# Altium PCB PCB1.PcbDoc
Units mil, origin at the board's own origin, x right, y up, seen from the top; angles counter-clockwise.
Board outline 2290 x 3500 mil, 2 copper layers (Top Layer, Bottom Layer); 65 components, 55 nets, 269 pads, 79 vias.
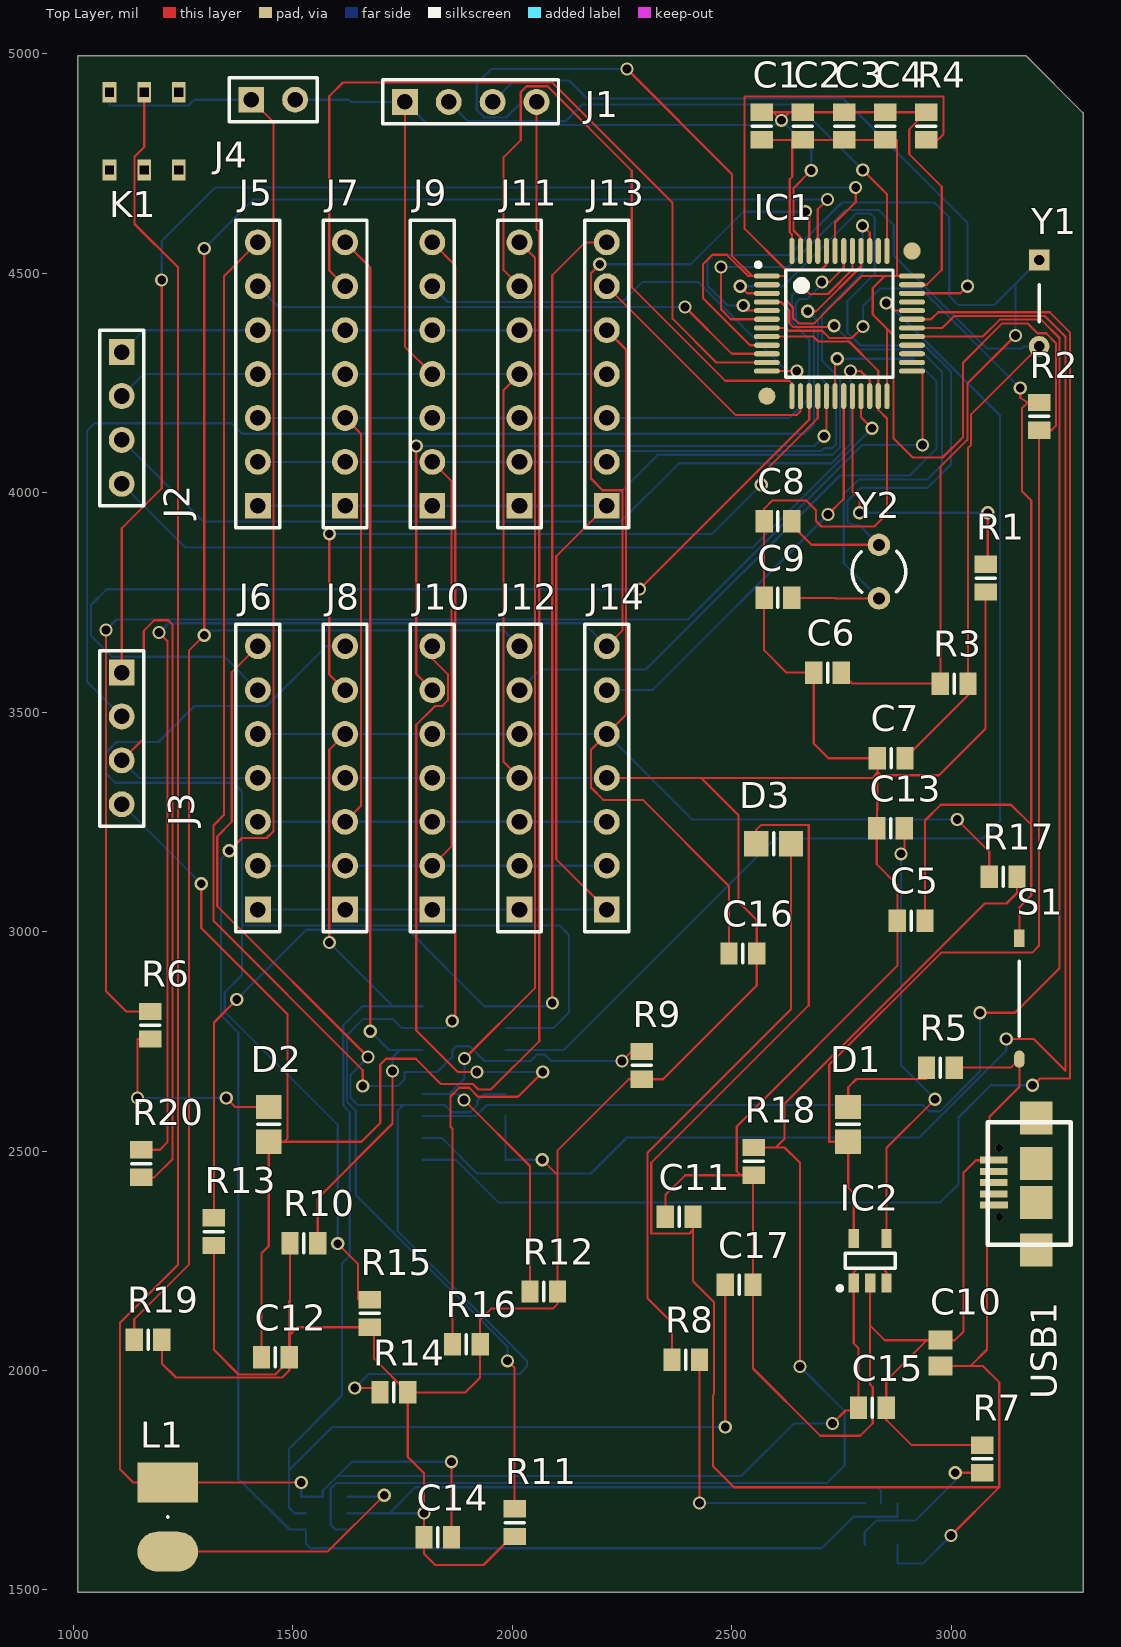
[diagram p0: Top Layer view]
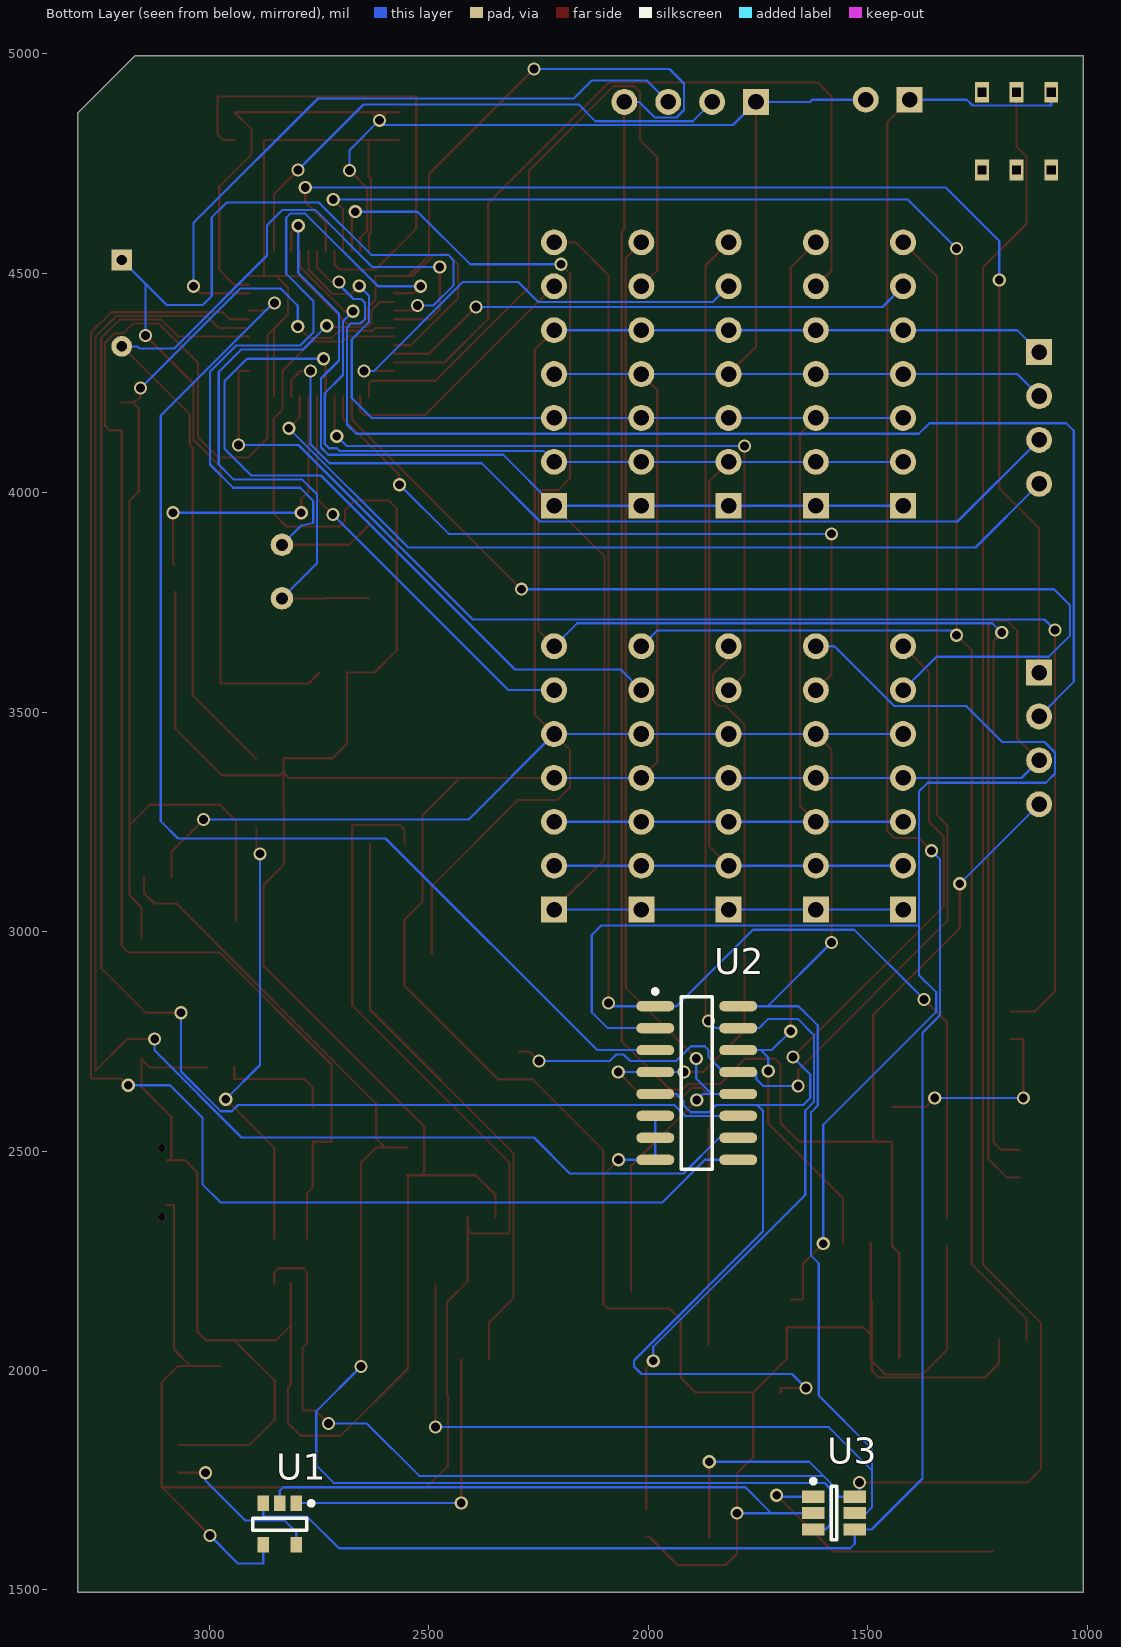
[diagram p1: Bottom Layer view, seen from below]

## Layer stack, top to bottom
Top Solder: solder mask 0.4, Solder Resist, Dk 3.5
Top Layer: signal copper 1.4
Dielectric 1: dielectric 12.6, FR-4, Dk 4.8
Bottom Layer: signal copper 1.4
Bottom Solder: solder mask 0.4, Solder Resist, Dk 3.5

## Board outline
1010,1495 1010,4995 3170,4995 3300,4865 3300,1495

## Design rules (kind name [scope] priority, off if disabled: settings)
Clearance [All] p1: gap=3.5 ignorepadtopadclearanceinfootprint=TRUE except(0: Arc-Hole Track-Hole SMDPad-Hole THPad-Hole Via-Hole Fill-Hole Poly-Hole Region-Hole Text-Hole; 10: Arc-SMDPad Arc-Via Track-SMDPad Track-Via SMDPad-Via Via-Via)
PolygonConnect [All] p1: connectstyle=Relief reliefconductorwidth=10 reliefentries=4 polygonreliefangle="90 Angle" airgapwidth=10
RoutingVias [All] p1: holewidth=20 width=30 viastyle="Through Hole" minholewidth=15 minwidth=30 maxholewidth=20 maxwidth=50
SolderMaskExpansion [All] p1: expansion=4
Width Width_2 [All] p1: maxlimit=5 minlimit=5 preferedwidth=5 minimp=50.000000 maximp=50.000000 favimp=50.000000
30 further rules are at their usual default settings.

## Components (designator, comment, footprint, x,y, rotation, side; value= is the part's Value field where it differs from the comment)
C1 "Cap Semi" 6-0805_L 2568,4835 r270 top value=104
C2 "Cap Semi" 6-0805_L 2661.75,4835 r270 top value=1uf
C3 "Cap Semi" 6-0805_L 2755.5,4835 r270 top value=104
C4 "Cap Semi" 6-0805_L 2849.25,4835 r270 top value=104
C5 "Cap Semi" 6-0805_L 2908.5,3025 r0 top value=104
C6 "Cap Semi" 6-0805_L 2718,3590 r0 top value=22pF
C7 "Cap Semi" 6-0805_L 2863,3395 r0 top value=22pF
C8 "Cap Semi" 6-0805_L 2605,3935 r0 top value=22pF
C9 "Cap Semi" 6-0805_L 2605,3760 r0 top value=22pF
C10 "Cap Pol3" C0805 2975,2039.53 r90 top value=1uF
C11 "Cap Semi" 6-0805_L 2380,2350 r0 top value=104
C12 "Cap Semi" 6-0805_L 1460,2030 r180 top value=2.2uF
C13 "Cap Semi" 6-0805_L 2861.5,3235 r0 top value=470pF
C14 "Cap Semi" 6-0805_L 1830,1620 r0 top value=10uF
C15 "Cap Semi" 6-0805_L 2820,1915 r180 top value=0.1uF
C16 "Cap Semi" 6-0805_L 2525,2950 r180 top value=0.1uf
C17 "Cap Semi" 6-0805_L 2516.5,2195 r180 top value=22uf
D1 "LED" 6-0805_M 2765,2560.63 r90 top
D2 "LED" 6-0805_M 1445,2560.63 r90 top
D3 "LED" 6-0805_M 2595,3200 r0 top
IC1 "STM32F103C8T6" LQFP48 2745,4385 r0 top
IC2 "MIC5205-3.3" SOT-23-5 2815,2250 r90 top
J1 "CON4" HDR1X4 1755,4890 r0 top
J2 "蓝牙" HDR1X4 1110,4320 r270 top
J3 "MPU6050" HDR1X4 1110,3590 r270 top
J4 "BAT" HDR1X2 1405,4895 r0 top
J5 "CON7" HDR1X7 1420,3970 r90 top
J6 "CON7" HDR1X7 1420,3050 r90 top
J7 "CON7" HDR1X7 1618.75,3970 r90 top
J8 "CON7" HDR1X7 1618.75,3050 r90 top
J9 "CON7" HDR1X7 1817.5,3970 r90 top
J10 "CON7" HDR1X7 1817.5,3050 r90 top
J11 "CON7" HDR1X7 2016.25,3970 r90 top
J12 "CON7" HDR1X7 2016.25,3050 r90 top
J13 "CON7" HDR1X7 2215,3970 r90 top
J14 "CON7" HDR1X7 2215,3050 r90 top
K1 "BUTTON" switch 1240,4912.17 r270 top
L1 "10UH" 0850 1215,1745 r270 top
R1 "Res3" 6-0805_L 3078,3805 r270 top value=10K
R2 "Res3" 6-0805_L 3200,4173.5 r270 top value=10K
R3 "Res3" 6-0805_L 3006.5,3565 r0 top value=10M
R4 "Res3" 6-0805_L 2943,4835 r270 top value=10K
R5 "Res3" 6-0805_L 2975,2690 r180 top value=1K
R6 "Res3" 6-0805_L 1175,2786.5 r270 top value=1K
R7 "Res3" 6-0805_L 3070,1798.5 r90 top value=330
R8 "Res3" 6-0805_L 2395,2025 r180 top value=330
R9 "Res3" 6-0805_L 2295,2695 r90 top value=10K
R10 "Res3" 6-0805_L 1525,2290 r0 top value=10K
R11 "Res3" 6-0805_L 2005,1653.5 r90 top value=10K
R12 "Res3" 6-0805_L 2071.5,2180 r180 top value=10K
R13 "Res3" 6-0805_L 1320,2316.5 r90 top value=10K
R14 "Res3" 6-0805_L 1730,1950 r180 top value=10K
R15 "Res3" 6-0805_L 1675,2130 r90 top value=10K
R16 "Res3" 6-0805_L 1895,2060 r180 top value=10K
R17 "Res3" 6-0805_L 3118,3125 r0 top value=525K
R18 "Res3" 6-0805_L 2550,2476.5 r270 top value=100k
R19 "Res3" 6-0805_L 1170,2070 r180 top value=10K
R20 "Res3" 6-0805_L 1155,2471.5 r90 top value=10K
S1 "KEY_2P" SOP2 3155,2985 r270 top
U1 "PW4054" SOT-23-CT5_L 2840,1650 r270 bottom
U2 "CD4051BCM" M16A_N 1890,2655 r180 bottom
U3 "PS7516" SOT23-6_M 1577.24,1675 r180 bottom
USB1 "MICRO USB" "MICRO USB" 3145,2425 r90 top
Y1 "XTAL_8M" xtal 3200,4530 r270 top
Y2 "XTAL_32.768K" R38 2835,3820 r0 top

## Footprints (in the part's own frame and the unit in brackets; to place one, negate y for a bottom-side part, rotate by r counter-clockwise, add the part's x,y. Pads: shape width x height; smd on the part's side, far side on the other; paste and mask are expansions set on the pad)
6-0805_L [mm] "Chip Resistor, Body 2.0x1.2mm, IPC High Density"
  rect 1x1.3 smd: 1(-0.8,0) 2(0.8,0)
  silkscreen extent 0,-0.55 0,0.55, body extent -1.07,-0.7 1.07,0.7, height 0.7
6-0805_M [mm] "Chip Resistor, Body 2.0x1.2mm, IPC Low Density"
  rect 1.4x1.5 smd: 1(-1,0) 2(1,0)
  silkscreen extent 0,-0.65 0,0.65, body extent -1.07,-0.7 1.07,0.7, height 0.7
0850 [mm]
  rect 2.3x3.5 smd: 1(0,0)
  oval 2.3x3.5 smd: 2(4,0)
  silkscreen extent 1.99,0 2.01,0
C0805 [mm] "Chip Capacitor, Body 2.0x1.3mm, IPC High Density"
  rect 1.1x1.4 smd: 1(-0.75,0) 2(0.75,0)
  body extent -1.1,-0.72 1.1,0.72, height 1.4
HDR1X2 [mm] "Connector; Header; 2 Position"
  rect 1.5x1.5 hole 0.9: 1(0,0)
  round 1.5 hole 0.9: 2(2.54,0)
  silkscreen extent -1.27,-1.27 3.81,1.27
HDR1X4 [mm] "Connector; Header; 4 Position"
  rect 1.5x1.5 hole 0.9: 1(0,0)
  round 1.5 hole 0.9: 2(2.54,0) 3(5.08,0) 4(7.62,0)
  silkscreen extent -1.27,-1.27 8.89,1.27, body extent -1.27,-1.27 8.89,1.27, height 8.38
HDR1X7 [mm] "Connector; Header; 7 Position"
  rect 1.5x1.5 hole 0.9: 1(0,0)
  round 1.5 hole 0.9: 2(2.54,0) 3(5.08,0) 4(7.62,0) 5(10.16,0) 6(12.7,0) 7(15.24,0)
  silkscreen extent -1.27,-1.27 16.51,1.27
LQFP48 [mm]
  oval 1.5x0.3 smd: 1(-4.2,2.75) 2(-4.2,2.25) 3(-4.2,1.75) 4(-4.2,1.25) 5(-4.2,0.75) 6(-4.2,0.25) 7(-4.2,-0.25) 8(-4.2,-0.75) 9(-4.2,-1.25) 10(-4.2,-1.75) 11(-4.2,-2.25) 12(-4.2,-2.75) 25(4.2,-2.75) 26(4.2,-2.25) 27(4.2,-1.75) 28(4.2,-1.25) 29(4.2,-0.75) 30(4.2,-0.25) 31(4.2,0.25) 32(4.2,0.75) 33(4.2,1.25) 34(4.2,1.75) 35(4.2,2.25) 36(4.2,2.75)
  oval 0.3x1.5 smd: 13(-2.75,-4.2) 14(-2.25,-4.2) 15(-1.75,-4.2) 16(-1.25,-4.2) 17(-0.75,-4.2) 18(-0.25,-4.2) 19(0.25,-4.2) 20(0.75,-4.2) 21(1.25,-4.2) 22(1.75,-4.2) 23(2.25,-4.2) 24(2.75,-4.2) 37(2.75,4.2) 38(2.25,4.2) 39(1.75,4.2) 40(1.25,4.2) 41(0.75,4.2) 42(0.25,4.2) 43(-0.25,4.2) 44(-0.75,4.2) 45(-1.25,4.2) 46(-1.75,4.2) 47(-2.25,4.2) 48(-2.75,4.2)
  round 1 smd: 49(-4.2,-4.2) 50(4.2,4.2)
  silkscreen extent -4.82,-3.1 3.1,3.52, body extent -4.49,-4.5 4.5,4.5, height 1.6
M16A_N [mm] "SOIC, 16-Leads, Body 9.9x3.9mm, Pitch 1.27mm, IPC Medium Density"
  oval 2.2x0.6 smd: 1(-2.4,4.445) 2(-2.4,3.175) 3(-2.4,1.905) 4(-2.4,0.635) 5(-2.4,-0.635) 6(-2.4,-1.905) 7(-2.4,-3.175) 8(-2.4,-4.445) 9(2.4,-4.445) 10(2.4,-3.175) 11(2.4,-1.905) 12(2.4,-0.635) 13(2.4,0.635) 14(2.4,1.905) 15(2.4,3.175) 16(2.4,4.445)
  silkscreen extent -2.53,-5 0.9,5.42, body extent -2,-5 2,5, height 1.75
"MICRO USB" [mm]
  rect 0.4x1.6 smd: 1(-1.216,1.214) 2(-0.575,1.225) 3(0.075,1.225) 4(0.725,1.225) 5(1.375,1.225)
  rect 1.9x1.9 smd: ""(-3.825,-1.225) ""(-1.075,-1.225) ""(1.175,-1.225) ""(3.825,-1.225)
  silkscreen extent -3.53,-3.22 3.57,1.58, body extent -4.43,-3.77 4.38,1.82, height 2.54
R38 [mm] "Crystal, Thru-Hole; 2 Leads; Body 3.1 x 8.2 mm (Dia.xH)"
  round 1.3 hole 0.7: 1(0,1.55) 2(0,-1.55)
  silkscreen extent -1.55,-1.19 1.55,1.17
SOP2 [mm]
  rect 1x0.6 smd: 1(0,0)
  oval 1x0.6 smd: 2(7,0)
  silkscreen extent 1.34,0 5.67,0
SOT23-6_M [mm] "SOT23, 6-Leads, Body 2.9x1.6mm, Pitch 0.95mm, Lead Span 2.7mm, IPC Low Density"
  rect 1.3x0.7 smd: 1(-1.2,0.95) 2(-1.2,0) 3(-1.2,-0.95) 4(1.2,-0.95) 5(1.2,0) 6(1.2,0.95)
  silkscreen extent -1.33,-1.55 0.15,1.97, body extent -0.9,-1.55 0.9,1.55, height 1.45
SOT-23-5 [mm]
  rect 1.1x0.6 smd: 1(-1.3,0.95) 2(-1.3,0) 3(-1.3,-0.95) 4(1.3,-0.95) 5(1.3,0.95)
  silkscreen extent -1.72,-1.45 0.42,1.87, body extent -1.37,-1.45 1.43,1.45, height 1.45
SOT-23-CT5_L [mm] "SOT23, 5-Leads, Body 2.9x1.6mm, Pitch 0.95mm, Lead Span 2.7mm, IPC High Density"
  rect 0.9x0.65 smd: 1(-1.2,0.95) 2(-1.2,0) 3(-1.2,-0.95) 4(1.2,-0.95) 5(1.2,0.95)
  silkscreen extent -1.32,-1.55 0.35,1.95, body extent -0.9,-1.55 0.9,1.55, height 1.45
switch [mm]
  rect 1.2x0.8 hole 0.5 square: 1(0,0) 2(0,-2) 3(0,-4) 4(4.5,0) 5(4.5,-2) 6(4.5,-4)
xtal [mm]
  rect 1.2x1.2 hole 0.6: 1(0,0)
  round 1.2 hole 0.6: 2(5,0)
  silkscreen extent 1.43,0 3.56,0

## Part data
C1 C2 C3 C4 C5 C6 C7 C8 C9 C11 C12 C13 C14 C15 C16 C17: "Capacitor (Semiconductor SIM Model)", LatestRevisionDate=29-May-2009, LatestRevisionNote="IPC-7351 Footprint Added.", PackageDescription="Chip Capacitor", PackageReference=C1206, Published=8-Jun-2000, Publisher="Altium Limited"
C10: "Polarized Capacitor (Surface Mount)", LatestRevisionDate=29-May-2009, LatestRevisionNote="IPC-7351 Footprint Added.", PackageDescription="Chip Capacitor", PackageReference=C0805, Published=8-Jun-2000, Publisher="Altium Limited"
IC1: "单片机", ComponentLink1Description="Manufacturer Link", ComponentLink1URL=www.st.com/stm32, ComponentLink2Description=Datasheet, ComponentLink2URL=http://www.st.com/stonline/products/literature/ds/13587.pdf, DatasheetVersion="rev6, Mar-2008", PackageDescription="48-Pin Low-Profile Quad Flat Pack, 7 x 7 mm Body, 0.5 mm Pitch (LQFP48)", PackageReference=LQFP48, PackageVersion=Mar-2008, Published=30-May-2008, Publisher="Altium Limited"
IC2: "稳压"
J1: "连接器"
J2 J3: library part CON4, "Connector"
J4: library part CON2, "Conjunctor"
J5 J6 J7 J8 J9 J10 J11 J12 J13 J14: "Connector"
K1: "自锁按键"
L1: library part Inductor, "电感"
R1 R2 R3 R4 R5 R6 R7 R8 R9 R10 R11 R12 R13 R14 R15 R16 R17 R18 R19 R20: "Resistor", LatestRevisionDate=29-May-2009, LatestRevisionNote="IPC-7351 Footprint Added.", PackageDescription="Chip Resistor", PackageReference=J1-0603, Published=8-Jun-2000, Publisher="Altium Limited"
S1: "轻触按键2P"
U2: "8-Channel Analog Multiplexer/Demultiplexer", Code_IPC=SOIC127P600-16, ComponentLink1Description="Manufacturer Link", ComponentLink1URL=http://www.fairchildsemi.com/, ComponentLink2Description=Datasheet, ComponentLink2URL=http://www.fairchildsemi.com/ds/CD%2FCD4052BC.pdf, DatasheetVersion=Jan-1999, LatestRevisionDate=13-Apr-2006, LatestRevisionNote="IPC-7351 Footprint Added.", PackageDescription="16-Pin Small Outline Integrated Circuit 1.27 mm Pitch", PackageReference=M16A, PackageVersion=2000, Published=17-Jul-2002, Publisher="Altium Limited"
Y1 Y2: library part XTAL, "Crystal Oscillator", LatestRevisionDate=17-Jul-2002, LatestRevisionNote="Re-released for DXP Platform.", PackageDescription="Crystal, Thru-Hole; 2 Leads; Body 3.1 x 8.2 mm (Dia.xH)", PackageReference=R38, Published=8-Jun-2000, Publisher="Altium Limited"

## Via types
v1: diameter 30, hole 20, Top Layer to Bottom Layer, 77 vias
v2: diameter 17.72, hole 17.72, Top Layer to Bottom Layer, 2 vias

## Nets (pads, with @x,y where several pads share a name; then routed paths per layer and width w, separated by ;. In a path a pad name is that pad's centre, name@x,y a point inside that pad or via, vN(x,y) a via of type N, cw(c..) or ccw(c..) an arc to the next point about the centre after c; other vN are vias at no path point)
+5: C16.2 C17.2 J2.1 J5.5 J6.5 J7.5 J8.5 J9.5 J10.5 J11.5 J12.5 J13.5 J14.5 R17.1 U2.16 U3.5 | length 8073.6
  Top Layer w5: v1(1583,2975) 1583,3414.25 J8.5 ; J13.5 2259.03,4325.97 2259.03,3494.03 J14.5 2179,3414 2179,3328 2207,3300 2297,3300 2493.5,3103.5 C16.2 ; v1(2485,1871) C17.2 ; v1(3013.5,3255) 3086.5,3182 R17.1
  Bottom Layer w5: J2.1 1160,4370 J5.5 J7.5 J9.5 J11.5 J13.5 ; J6.5 J8.5 J10.5 J12.5 J14.5 2410,3255 v1(3013.5,3255) ; U3.5 1504,1675 1491,1688 1491,1773 ; v1(1583,2975) 1728,2830 ; U2.16 1728,2830 ; v1(2485,1871) 1589,1871 1491,1773 ; 1491,1773 1491,1822 1612,1943 1612,2244.02 1629.5,2261.52 1629.5,2588.5 1614.5,2603.5 1614.5,2786.5 1658,2830 1728,2830
ADC0: IC1.10 J5.6 | length 1223.4
  Top Layer w5: v1(2393.1,4423) 2500,4316.1 IC1.10
  Bottom Layer w5: J5.6 1467,4423 v1(2393.1,4423)
ADC1: IC1.11 J7.6 | length 1875.8
  Top Layer w5: J7.6 1583,4505.75 1583,4903 1614.03,4934.03 2090.53,4934.03 2365,4659.56 2365,4396 2464.58,4296.42 IC1.11
ADC2: IC1.12 J9.6 | length 1017
  Top Layer w5: IC1.12 v1(2648,4276.73)
  Bottom Layer w5: J9.6 1853.5,4434 2251,4434 2297,4480 2422.69,4480 2625.95,4276.73 v1(2648,4276.73)
ADC3: IC1.13 J11.6 | length 1562.1
  Top Layer w5: J11.6 1980,4506.25 1980,4764 2019,4803 2019,4912.53 2032,4925.53 2080,4925.53 2272,4733.53 2272,4468 2485,4255 2630.96,4255 2636.73,4249.23 IC1.13
ADC4: IC1.14 J13.6 | length 600.5
  Top Layer w5: J13.6 2508,4177 2648,4177 2656.42,4185.42 IC1.14
ADC5: IC1.15 J6.6 | length 2365.6
  Top Layer w5: v1(2289.5,3780) 2676.1,4166.6 IC1.15
  Bottom Layer w5: J6.6 1344,3626 1088,3626 1040,3674 1040,3744 1076,3780 v1(2289.5,3780)
ADC6: IC1.16 J8.6 | length 1656.2
  Top Layer w5: v1(1583,3906) 1583,3585.75 J8.6 ; v1(2567,4018) 2567,4040.5 2695.79,4169.29 IC1.16
  Bottom Layer w5: v1(1583,3906) 2455,3906 v1(2567,4018)
ADC7: IC1.17 J10.6 | length 1602.9
  Top Layer w5: v1(1781,4106) 1781,3586.5 J10.6 ; v1(2710,4128.5) 2715.47,4133.97 IC1.17
  Bottom Layer w5: v1(1781,4106) 2687.5,4106 v1(2710,4128.5)
ADC8: IC1.18 J12.6 | length 1665.7
  Top Layer w5: IC1.18 2735.16,4300.16 v1(2740,4305)
  Bottom Layer w5: J12.6 2063.25,3597 2304,3597 2746.11,4039.11 2905.11,4039.11 2965.93,4099.93 2965.93,4253.61 2914.54,4305 v1(2740,4305)
ADC9: IC1.19 J14.6 | length 954.1
  Top Layer w5: v1(2719,3950.2) 2754.84,3986.04 IC1.19
  Bottom Layer w5: J14.6 2318.8,3550 v1(2719,3950.2)
Address_0: IC1.29 U2.11 | length 3485.9
  Top Layer w5: IC1.29 3071.47,4355.47 3110,4394 3204.59,4394 3246.59,4352 3246.59,2916.59 3145,2815 v1(3065,2815)
  Bottom Layer w5: U2.11 1916.5,2580 1941.5,2605 2935.05,2605 2949.55,2590.5 2974.39,2590.5 3065,2681.11 v1(3065,2815)
Address_1: IC1.30 U2.10 | length 3722.4
  Top Layer w5: IC1.30 2979,4375.16 3006.34,4402.5 3212.5,4402.5 3260,4355 3260,2683 3188,2755 v1(3125,2755)
  Bottom Layer w5: U2.10 1839,2530 1920,2449 2179,2449 2261,2531 2926.91,2531 3125,2729.09 v1(3125,2755)
Address_2: IC1.31 U2.9 | length 3805.9
  Top Layer w5: IC1.31 2953.84,4394.84 2970,4411 3224,4411 3270,4365 3270,2665 3201.82,2665 3186.82,2650 v1(3185,2650)
  Bottom Layer w5: U2.9 1871,2480 1968,2383 2975,2383 3016.32,2424.32 3016.32,2576.32 3090,2650 v1(3185,2650)
Address_3: IC1.39 J5.1 J6.1 J7.1 J8.1 J9.1 J10.1 J11.1 J12.1 J13.1 J14.1 | length 3816.4
  Top Layer w5: J14.1 2100,3165 2100,3855 J13.1 ; v1(2797.9,4608) 2813.9,4592 IC1.39
  Bottom Layer w5: J6.1 J8.1 J10.1 J12.1 J14.1 ; J5.1 J7.1 J9.1 J11.1 J13.1 2331.02,4086.02 2729.52,4086.02 2746,4102.5 2746,4260 2705,4301 2705,4407.53 2797.9,4500.43 v1(2797.9,4608)
Address_4: IC1.40 J5.2 J6.2 J7.2 J8.2 J9.2 J10.2 J11.2 J12.2 J13.2 J14.2 | length 3613.7
  Top Layer w5: J10.2 1861.53,3194.03 1861.53,4025.97 J9.2 ; v1(2673,4413) 2692,4413 2794.21,4515.21 IC1.40
  Bottom Layer w5: J6.2 J8.2 J10.2 J12.2 J14.2 ; J5.2 J7.2 J9.2 J11.2 J13.2 2240,4095 2704,4095 2710,4101 2728,4101 2737.5,4110.5 2737.5,4226.5 2696,4268 2696,4390 v1(2673,4413)
Address_5: IC1.41 J5.3 J6.3 J7.3 J8.3 J9.3 J10.3 J11.3 J12.3 J13.3 J14.3 | length 3489.4
  Top Layer w5: J8.3 1655,3286.25 1655,4133.75 J7.3 ; v1(2659,4471) 2677.5,4452.5 2719.03,4452.5 2774.53,4508 IC1.41
  Bottom Layer w5: J6.3 J8.3 J10.3 J12.3 J14.3 ; J5.3 J7.3 J9.3 J11.3 J13.3 2630.73,4170 2676.12,4215.4 2676.12,4348.88 2637,4388 2637,4449 v1(2659,4471)
BAT: J4.1 K1.3 U1.3 U3.4 | length 5265.9
  Top Layer w5: v1(1355,3184) 1384,3213 1440,3213 1456,3229 1456,4844 J4.1
  Bottom Layer w5: K1.3 1082.52,4882 1262,4882 1275,4895 J4.1 ; v1(1355,3184) 1336,3165 1336,2809 1375.5,2769.5 1375.5,1754.1 1492,1637.6 U3.4 1530,1605 1540,1595 2705,1595 2777,1667 2877.4,1667 U1.3
BAT+: C14.2 C15.2 IC2.1 IC2.3 K1.2 L1.1 U3.6 | length 5930.7
  Top Layer w5: K1.2 1161.26,4787.26 1139,4765 1139,4612.02 1238,4513.02 1238,2241 1106,2109 1106,1775 1136,1745 L1.1 v1(1519,1745) ; C14.2 v1(1861.5,1792) ; v1(2729,1879) 2759,1909 2788.5,1909 C15.2 2788.5,2051 2777.6,2061.91 IC2.1 2777.6,2224 2786.6,2233 2843.4,2233 2852.4,2224 IC2.3
  Bottom Layer w5: v1(1519,1745) 1519,1712.4 U3.6 1568,1712.4 1568,1726 1602,1760 ; v1(1861.5,1792) 1634,1792 1602,1760 ; v1(2729,1879) 2641,1879 2522,1760 1602,1760
BOOT0: IC1.44 R4.2 | length 1144.8
  Top Layer w5: IC1.44 2715.47,4519.47 2704,4508 2622,4508 2529,4601 2529,4902 2982,4902 2982,4816 2969.5,4803.5 R4.2
BOOT1: IC1.20 R1.1 | length 687
  Top Layer w5: IC1.20 2774.53,4002.47 2791,3986 v1(2791,3954) ; R1.1 3083,3836.5 v1(3083,3954)
  Bottom Layer w5: v1(2791,3954) v1(3083,3954)
Common_Out: IC1.32 U2.3 | length 2698.2
  Top Layer w5: v1(2851.72,4432) 2869.19,4414.53 IC1.32
  Bottom Layer w5: U2.3 2117,2730 2599,3212 3072,3212 3111,3251 3111,4175.55 2854.55,4432 v1(2851.72,4432)
EX0: J5.7 R9.2 U2.13 | length 2831.8
  Top Layer w5: J5.7 1343,4493 1343,3265.74 1319,3241.74 1319,3024.3 1659,2684.3 v1(1659,2648) ; v1(2249.5,2705) 2271,2726.5 R9.2
  Bottom Layer w5: v1(1659,2648) 1738.5,2648 1754.5,2664 1754.5,2680 U2.13 1829,2680 1863.5,2714.5 1863.5,2730 1872,2738.5 1903.17,2738.5 1936.67,2705 2041.7,2705 2056.7,2720 2073.27,2720 2088.27,2705 v1(2249.5,2705)
EX1: J7.7 R10.2 U2.14 | length 2475.7
  Top Layer w5: R10.2 1556.5,2392 1727,2562.5 v1(1727,2682) ; J7.7 1676,4512.75 v1(1676,2773)
  Bottom Layer w5: v1(1676,2773) 1719,2730 1744,2730 ; v1(1727,2682) 1727,2713 1744,2730 ; U2.14 1744,2730
EX2: J9.7 R11.2 U2.15 | length 3306.6
  Top Layer w5: J9.7 1870.03,4517.47 1870.03,2803.03 v1(1863,2796) ; v1(1989,2022) 2005,2006 R11.2
  Bottom Layer w5: v1(1863,2796) 1847,2780 U2.15 1748,2780 1727,2801 1660,2801 1623,2764 1623,2612 1643,2592 1643,2400 1989,2054 v1(1989,2022)
EX3: J11.7 R12.2 U2.12 | length 2634.2
  Top Layer w5: v1(1890,2616) 2040,2466 R12.2 ; v1(1891,2711) 2051.78,2871.78 2051.78,4534.47 J11.7
  Bottom Layer w5: U2.12 1856,2630 ; v1(1890,2616) 1876,2630 1856,2630 ; v1(1891,2711) 1891,2665 1856,2630
EX4: J13.7 R13.2 U2.1 | length 3191.4
  Top Layer w5: R13.2 1320,2793 v1(1372,2845) ; v1(2091,2837) 2091,4495 2166,4570 J13.7
  Bottom Layer w5: v1(1372,2845) 1531,3004 1762,3004 1936,2830 U2.1 2084,2830 v1(2091,2837)
EX5: J6.7 R14.2 U2.5 | length 2818.1
  Top Layer w5: J6.7 1360.7,3590.7 1360.7,3249.89 1327.5,3216.7 1327.5,3057.5 v1(1671,2714) ; v1(1641,1960) 1698.5,1960 R14.2
  Bottom Layer w5: v1(1641,1960) 1673,1992 2016,1992 2033,2009 2033,2023 1739,2317 1739,2592 1752,2605 ; v1(1671,2714) 1631.5,2674.5 1631.5,2621 1647.5,2605 1752,2605 ; U2.5 1936,2630 1920,2614 1920,2604.5 1904,2588.5 1862.5,2588.5 1846,2605 1752,2605
EX6: J8.7 R15.2 U2.2 | length 3436.1
  Top Layer w5: v1(1602,2289) 1648,2243 1648,2161.5 R15.2
  Bottom Layer w5: v1(1602,2289) 1602,2560 1344.5,2817.5 1344.5,2861.5 1384,2901 1384,3014 ; J8.7 1576,3650 1440,3514 1276,3514 1194,3432 1098,3432 1074,3408 1074,3360 1095,3339 1364,3339 1384,3319 1384,3014 ; U2.2 2093,2780 2129,2816 2129,2992 2107,3014 1384,3014
EX7: J10.7 R16.2 U2.4 | length 2072.4
  Top Layer w5: J10.7 1817.5,3621.53 1853.03,3586 1853.03,3527.03 1840,3514 1824,3514 1781,3471 1781,2774.5 1875.5,2680 v1(1919,2680) ; R16.2 1863.5,2551 1859,2555.5 1859,2624 1879,2644 1901.5,2644 1921.75,2623.75 2012.75,2623.75 v1(2069,2680)
  Bottom Layer w5: v1(1919,2680) U2.4 v1(2069,2680)
EX8: IC1.45 J12.7 R19.2 | length 4881.9
  Top Layer w5: R19.2 1138.5,2117 1263.5,2242 1263.5,3640.5 v1(1298,3675) v1(1298,4556) ; IC1.45 2695.79,4645.29 v1(2718,4667.5)
  Bottom Layer w5: v1(1298,3675) 1308.53,3685.53 1980.72,3685.53 J12.7 ; v1(1298,4556) 1409.5,4667.5 v1(2718,4667.5)
EX9: IC1.46 J14.7 R20.2 | length 3846.3
  Top Layer w5: R20.2 1197,2502.99 1214,2519.99 1214,3662 v1(1195,3681) ; v1(2199,4520) 2179,4500 2179,4032 2205.47,4005.53 2250.53,4005.53 2250.53,3685.53 J14.7 ; v1(2668,4640) 2676.1,4631.9 IC1.46
  Bottom Layer w5: v1(1195,3681) 1216.5,3702.5 2162.5,3702.5 J14.7 ; v1(2199,4520) 2406,4520 2526,4640 v1(2668,4640)
GND: C1.1 C2.1 C3.1 C4.1 C5.1 C6.1 C7.1 C8.1 C9.1 C10.2 C11.1 C12.1 C13.1 C14.1 C15.1 C16.1 C17.1 IC1.8 IC1.23 IC1.35 IC1.47 IC2.2 J1.1 J2.2 J3.3 J4.2 J5.4 J6.4 J7.4 J8.4 J9.4 J10.4 J11.4 J12.4 J13.4 J14.4 R1.2 R4.1 R5.1 R7.2 R9.1 R10.1 R11.1 R12.1 R13.1 R14.1 R15.1 R16.1 R18.2 R19.1 R20.1 S1.2 U1.2 U2.6 U2.7 U2.8 U3.2 USB1.5 | length 20786.2
  Top Layer w5: J3.3 1160,3440 1160,3685 1184,3709 1216,3709 1226,3699 1226,2482 1184,2440 R20.1 ; R19.1 1201.5,2016 1233.5,1984 1475.5,1984 1491.5,2000 C12.1@1491.5,2022.5 ; R13.1 1320,2047 1376,1991 1460,1991 C12.1@1491.5,2022.5 ; R10.1 1493.5,2160.01 ; J1.1 1755,4332.5 J9.4 ; R11.1 1999,1622.01 1933.99,1557 1824,1557 1798.5,1582.5 C14.1 v1(1798.5,1675) 1798.5,1766 1761.5,1803.01 R14.1 ; J12.4 1980,3386.25 1980,4233.75 J11.4 ; v1(2068,2480) 2102.99,2445.01 ; J14.4 2430,3350 ; C11.1 2348.5,2400 2393.5,2445 2520,2445 ; R18.2 R18.2@2547.99,2445 ; C1.1 2594.5,4866.5 ; IC1.8 2685.49,4355.47 2696.96,4344 2766.97,4344 2833.58,4277.39 IC1.23 2833.58,4188.76 2853.48,4168.86 2853.48,3951.5 2824.68,3922.7 2704,3922.7 2691.5,3935.2 2691.5,3960 2669.5,3982 2592,3982 2573.5,3963.5 C8.1 C9.1 2573.5,3640.5 2624,3590 C6.1 2686.5,3428.5 2720,3395 C7.1 2831.5,3364.5 ; IC1.47 2656.42,4581.08 2640.5,4597 2640.5,4693.5 v1(2681,4734) ; IC2.2 2815,2102.06 ; IC1.35 2944,4473.58 2978,4507.58 2978,4697 2904,4771 2904,4827.5 R4.1 C4.1 C3.1 C2.1 2631.5,4866.5 ; R5.1 3135.59,2690 S1.2 3155,2646 3087,2578 USB1.5@3087,2479.13 ; R7.2 2909.5,1830 2851.5,1888 C15.1 2851.5,1976.55 2944,2069.06 ; R1.2 3078,3462 2972,3356 2840,3356 2831.5,3364.5 ; USB1.5 USB1.5@3087,2479.13 ; C12.1@1491.5,2022.5 C12.1 1491.5,2080 ; C12.1@1491.5,2022.5 1493.5,2024.5 1493.5,2082.01 ; 1491.5,2080 1493.5,2082.01 ; 1491.5,2080 1491.5,2158 1493.5,2160.01 ; 1493.5,2082.01 1493.5,2160.01 ; 1493.5,2082.01 1510,2098.5 R15.1 1685,2098.5 1685,2026.5 R14.1 ; R14.1 1892.5,1950 1926.5,1984 R16.1 1926.5,2115.5 1952,2141 2091.99,2141 2102.99,2152 R12.1 2102.99,2445.01 ; 2102.99,2445.01 2102.99,2501.5 2265,2663.5 R9.1 2343,2663.5 2556.5,2877 C16.1 2556.5,3026.5 2515,3068 2515,3265 2430,3350 ; 2430,3350 2821.5,3350 2831.5,3364.5 ; 2520,2445 R18.2@2547.99,2445 ; 2520,2445 2511,2454 2511,2555.99 2877.01,2922 C5.1 2877.01,3106 2830.01,3153 C13.1 2831.5,3315.5 2831.5,3364.5 ; R18.2@2547.99,2445 C17.1 2547.99,2004.66 2701.23,1851.43 2792.43,1851.43 2821,1880 2821,1962 2815,1968 2815,2102.06 ; 2594.5,4866.5 2631.5,4866.5 ; 2594.5,4866.5 v1(2613,4848) 2631.5,4866.5 ; 2815,2102.06 2848,2069.06 2944,2069.06 ; 2944,2069.06 C10.2 3008,2069.06 3028,2089.06 3028,2451.13 3056,2479.13 USB1.5@3087,2479.13
  Bottom Layer w5: J3.3 1150,3350 J6.4 J8.4 J10.4 J12.4 J14.4 ; J2.2 1160,4270 J5.4 J7.4 J9.4 J11.4 J13.4 ; J4.2 1627,4895 1632,4890 J1.1 1807.53,4837.47 2602.47,4837.47 v1(2613,4848) 2681,4780 v1(2681,4734) ; U3.2 1720,1675 ; v1(1798.5,1675) 1720,1675 ; U2.6 U2.7 U2.8 v1(2068,2480) ; U1.2 2840,1726 2832,1734 1779,1734 1720,1675
NetC13_2: C13.2 IC2.4 | length 1015.3
  Top Layer w5: IC2.4 2852.4,2507.4 v1(2963,2618) ; v1(2885,3177) 2893,3185 C13.2
  Bottom Layer w5: v1(2885,3177) 2885,2696 v1(2963,2618)
NetD1_2: D1.2 R5.2 | length 257.4
  Top Layer w5: D1.2 2765,2645 2784,2664 2943.5,2664 R5.2
NetD2_2: D2.2 R6.2 | length 470.7
  Top Layer w5: v1(1146,2621) 1146,2755 R6.2 ; v1(1348,2621) 1369,2600 D2.2
  Bottom Layer w5: v1(1146,2621) v1(1348,2621)
NetD3_2: D3.2 R8.2 | length 1333.3
  Top Layer w5: R8.2 2363.5,2109 2307.82,2164.69 2307.82,2495.82 2634.37,2822.37 D3.2
NetIC1_34: IC1.34 J1.3 | length 1513.6
  Top Layer w5: IC1.34 3020.5,4453.9 v1(3036.5,4469.9)
  Bottom Layer w5: J1.3 2004,4939 2129,4939 2170,4898 2753,4898 3036.5,4614.5 v1(3036.5,4469.9)
NetIC1_37: IC1.37 J1.2 | length 1246.2
  Top Layer w5: v1(2798.28,4734.72) 2853.27,4679.73 IC1.37
  Bottom Layer w5: J1.2 1899.03,4845.97 2120.97,4845.97 2159,4884 2649,4884 v1(2798.28,4734.72)
NetL1_2: L1.2 U3.1 | length 631.2
  Top Layer w5: L1.2 1579.52,1587.52 v1(1708,1716)
  Bottom Layer w5: U3.1 1704.4,1712.4 v1(1708,1716)
NetR7_1: R7.1 U1.5 | length 363.1
  Top Layer w5: v1(3009.01,1767.01) R7.1
  Bottom Layer w5: U1.5 2802.6,1632 2828.6,1658 2918,1658 3009.01,1749.01 v1(3009.01,1767.01)
NetR8_1: R8.1 U1.1 | length 703.9
  Top Layer w5: v1(2426.5,1698) R8.1
  Bottom Layer w5: v1(2426.5,1698) 2802.6,1698 U1.1
NetR17_2: R17.2 R18.1 U3.3 | length 3042.5
  Top Layer w5: R18.1 2599.99,2507.99 ; v1(2655,2009) 2655,2472.99 2620,2507.99 2599.99,2507.99 ; R17.2 3149.5,3088 3125.5,3064 3076,3064 2620,2608 2620,2528 2599.99,2507.99
  Bottom Layer w5: U3.3 1596.8,1637.6 1586.4,1648 1586.4,1731.4 1599,1744 2717,1744 2757,1784 2757,1907 v1(2655,2009)
NRST: C5.2 IC1.7 R2.1 S1.1 | length 2572.6
  Top Layer w5: IC1.7 2622.43,4375.16 2629.09,4368.5 2705.5,4368.5 2721.5,4352.5 2773.5,4352.5 v1(2799,4378) ; C5.2 2940,3253 2976,3289 3136,3289 3182,3243 ; S1.1 3155,3055 3182,3082 3182,3243 ; v1(3157,4238) 3157,4216 3174,4205 ; R2.1 3174,4205 ; 3174,4205 3161,4192 3161,4003 3182,3982 3182,3243
  Bottom Layer w5: v1(2799,4378) 2799,4425.72 2838.05,4464.78 2930.22,4464.78 v1(3157,4238)
PB12: IC1.25 R6.1 | length 3169.7
  Top Layer w5: v1(1074,3687) 1074,2863.99 1120,2817.99 R6.1 ; IC1.25 2934,4276.73 v1(2934,4108.23)
  Bottom Layer w5: v1(1074,3687) 1098,3711 2400,3711 2797.23,4108.23 v1(2934,4108.23)
POWER: C10.1 C11.2 D3.1 U1.4 USB1.1 | length 3728.3
  Top Layer w5: C11.2 2411.5,2320 ; D3.1 2555.63,3232 2566.63,3243 2675,3243 2675,2832 2316.32,2473.32 2316.32,2311.91 2403.4,2311.91 2411.5,2320 ; C10.1 3043,2010 ; v1(2999,1624) 3109,1734 ; USB1.1 3081,2377.13 3081,2048 3043,2010 ; 2411.5,2320 2411.5,2203.5 2459,2156 2459,1945 2457,1943 2457,1782 2505,1734 3109,1734 ; 3043,2010 3072,2010 3109,1973 3109,1734
  Bottom Layer w5: U1.4 2877.4,1560 2935,1560 v1(2999,1624)
RXD1: IC1.21 J2.4 | length 1965.1
  Top Layer w5: IC1.21 2794.21,4171.79 v1(2819.25,4146.75)
  Bottom Layer w5: J2.4 1255,3875 2547.5,3875 v1(2819.25,4146.75)
SCL: IC1.42 J3.2 | length 2856.5
  Top Layer w5: v1(2705,4480) 2722.84,4480 2754.84,4512 IC1.42
  Bottom Layer w5: J3.2 1031,3569 1031,4141 1048,4158 1360,4158 1384,4134 2666,4134 2687,4155 2687,4376 2677.5,4385.5 2656,4385.5 2645.5,4396 2645.5,4432 2654.5,4441 2672,4441 2705,4474 v1(2705,4480)
SDA: IC1.43 J3.1 | length 2816.3
  Top Layer w5: J3.1 1110,3919 1201,4010 v1(1201,4484) ; IC1.43 2735.16,4615.16 2782,4662 v1(2782,4695)
  Bottom Layer w5: v1(1201,4484) 1201,4573 1323,4695 v1(2782,4695)
TXD1: IC1.22 J2.3 | length 2065.9
  Top Layer w5: v1(2770,4277) 2792.9,4277 2813.9,4256 IC1.22
  Bottom Layer w5: J2.3 1296,3934 2247,3934 2379.81,4066.81 2726.82,4066.81 2770,4110 v1(2770,4277)
VCC3.3: C1.2 C2.2 C3.2 C4.2 C12.2 D1.1 D2.1 IC1.1 IC1.9 IC1.24 IC1.36 IC1.48 IC2.5 J1.4 J3.4 R2.2 | length 10989.5
  Top Layer w5: v1(1291,3109) 1291,3008 1488,2811 1488,2529.26 1480,2521.26 ; C12.2 1428.5,2267 1445,2283.5 D2.1 1480,2521.26 ; J1.4 2055,4600 2061,4594 2061,2750 1951,2640 1922.88,2640 1910,2652.88 1837.12,2652.88 1780,2710 1712,2710 1699,2697 1699,2564 1656.26,2521.26 1480,2521.26 ; v1(2261,4965) 2500,4726 2500,4539.77 2546.5,4493.27 ; C1.2 C2.2@2637.5,4803.5 ; IC1.9 2541.21,4335.79 2434.12,4442.88 2434.12,4520.12 2456,4542 2488.27,4542 2537,4493.27 2546.5,4493.27 ; IC1.48 2636.73,4588 2632,4592.73 2632,4713.9 2637.5,4719.4 C2.2@2637.5,4803.5 ; IC2.5 2777.6,2404 2765,2416.6 D1.1 2722,2521.26 2722,2697 2977,2952 3184,2952 3200,2968 R2.2 3228.1,4142.01 3238.09,4152 3238.09,4340.91 3216.23,4362.77 3196.23,4362.77 3173.5,4385.5 3116,4385.5 3026.41,4295.91 3026.41,4126.41 2980,4080 2912,4080 2868,4124 2868,4358.5 2853.27,4373.23 ; IC1.24 2853.27,4373.23 ; IC1.36 2877,4493.27 ; 2546.5,4493.27 IC1.1 2622,4493.27 2622,4439 2639.43,4421.57 2639.43,4396.96 2650.89,4385.5 2688,4385.5 2795.77,4493.27 2848,4493.27 ; C2.2@2637.5,4803.5 C2.2 C3.2 C4.2 2876,4803.5 2876,4494.27 2877,4493.27 ; 2848,4493.27 2877,4493.27 ; 2848,4493.27 2821,4466.27 2821,4405.5 2853.27,4373.23
  Bottom Layer w5: J3.4 v1(1291,3109) ; J1.4 2021,4890 1985.47,4854.47 1936,4854.47 1919,4871.47 1919,4932 1952,4965 v1(2261,4965)
XTAL_A: C6.2 IC1.5 R3.1 Y1.1 | length 2489.1
  Top Layer w5: v1(2526,4426) 2537.47,4414.53 IC1.5 ; C6.2 2774.5,3565 R3.1 2975.01,4059.01 3036.5,4120.5 3036.5,4248.5 v1(3146,4358)
  Bottom Layer w5: v1(2526,4426) 2490,4426 2444.5,4471.5 2444.5,4530 2456,4541.5 2631.5,4541.5 2751,4661 2961,4661 2995,4627 2995,4448 3016,4427 3097,4427 3146,4476 ; v1(3146,4358) 3146,4476 ; Y1.1 3146,4476
XTAL_B: C7.2 IC1.6 R3.2 Y1.2 | length 2226.8
  Top Layer w5: v1(2475.5,4514) 2475.5,4416.96 2497.62,4394.84 IC1.6 ; C7.2 3038,3538.5 R3.2 3038,4102 3045,4109 3045,4178.15 Y1.2
  Bottom Layer w5: v1(2475.5,4514) 2629,4514 2759,4644 2833.9,4644 2869,4608.9 2869,4540 3081,4328 3160,4328 3165.15,4333.15 Y1.2
XTAL_C: C8.2 IC1.3 Y2.1 | length 1854.2
  Top Layer w5: v1(2519,4469.9) 2535,4453.9 IC1.3 ; C8.2 2636.5,3926 2681.47,3881.02 Y2.1
  Bottom Layer w5: v1(2519,4469.9) 2616.3,4469.9 2781.9,4635.5 2816,4635.5 2825.4,4626.1 2825.4,4498.4 2763,4436 2763,4365 2793,4335 2939,4335 2999,4275 2999,4064 2946,4011 2793.5,4011 2763.5,3981 2763.5,3930.5 2791.02,3925 Y2.1
XTAL_D: C9.2 IC1.4 Y2.2 | length 1416.9
  Top Layer w5: IC1.4 2611.79,4434.21 2630.93,4415.07 2630.93,4386.07 2640,4377 2730,4377 v1(2733,4380) ; C9.2 2735,3760 2736.02,3758.98 Y2.2
  Bottom Layer w5: v1(2733,4380) 2787,4326 2927.81,4326 2979,4274.81 2979,4064 2944.49,4029.49 2788.49,4029.49 2755,3996 2755,3838.98 Y2.2
pads on no net: IC1.2 IC1.26 IC1.27 IC1.28 IC1.33 IC1.38 IC1.49 IC1.50 K1.1 K1.4 K1.5 K1.6 USB1. USB1.2 USB1.3 USB1.4
copper on no net:
  other v2: 3109,2350 3109,2507

## Silkscreen, mask and mechanical layers (free items; w line width, h text height)
Mechanical 1:
  the board outline again, w10

## Text inside footprints (layer, text, board x,y; h text height)
IC2: Mechanical 15 "1" at 2821.47,2267.71 h29.53 r180